# Altium PCB ATMEGA16_S52.PcbDoc
Units mm, origin at the board's own origin, x right, y up, seen from the top; angles counter-clockwise.
Board outline 152.4 x 101.6 mm, 2 copper layers (Top Layer, Bottom Layer); 2 components, 39 nets, 80 pads, 15 vias.
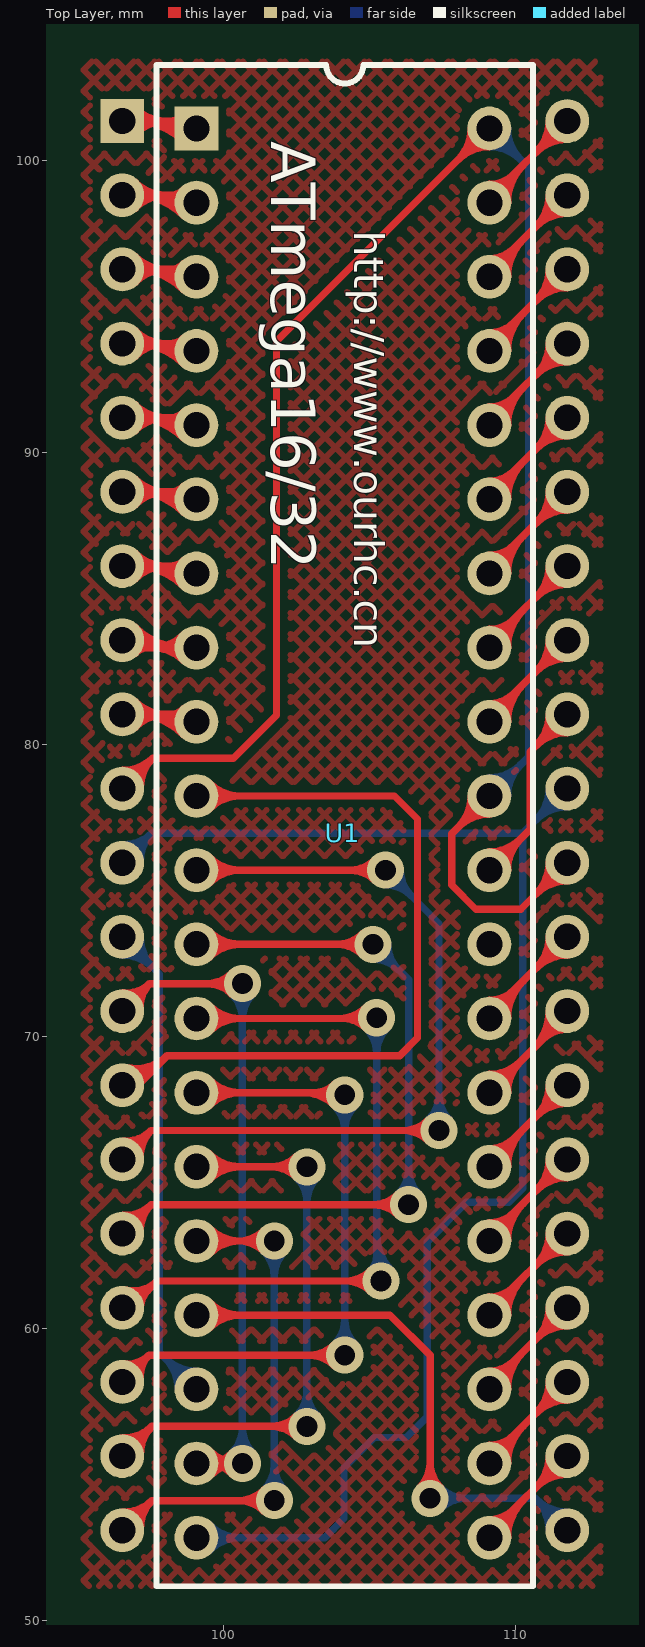
[diagram p0: Top Layer view]
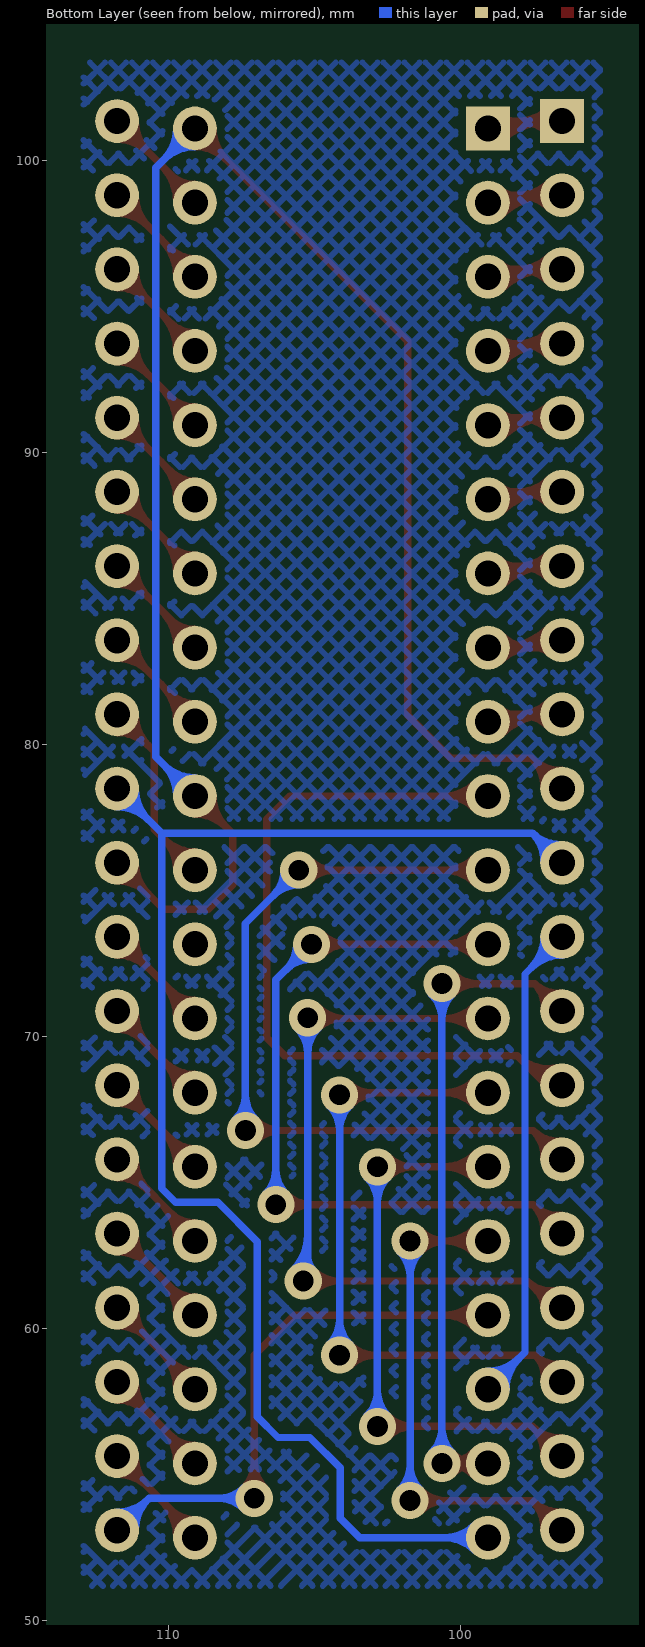
[diagram p1: Bottom Layer view, seen from below]

## Layer stack, top to bottom
Top Layer: signal copper 0.0356
Dielectric: dielectric 0.32, FR-4, Dk 4.8
Bottom Layer: signal copper 0.0356

## Board outline
25.4,25.4 177.8,25.4 177.8,127 25.4,127

## Design rules (kind name [scope] priority, off if disabled: settings)
Clearance [All] p1: gap=0.254
ComponentClearance [All] p1: gap=0.254 collisioncheckmode=3 verticalgap=0.254
PolygonConnect [All] p1: connectstyle=Relief reliefconductorwidth=0.254 reliefentries=4 polygonreliefangle="90 Angle"
RoutingVias [All] p1: holewidth=0.711 width=1.27 viastyle="Through Hole" minholewidth=0.711 minwidth=1.27 maxholewidth=0.711 maxwidth=1.27
SolderMaskExpansion [All] p1: expansion=0.102
TestPointUsage [All] p1: valid=0 allowmultiple=FALSE
Testpoint [All] p1: side=15 testpointundercomponent=TRUE minsize=1.016 maxsize=2.54 preferedsize=1.524 minholesize=0 maxholesize=1.016 preferedholesize=0.813 testpointgrid=0.025 style=1023 order=0-112345678
Width [All] p1: maxlimit=0.254 minlimit=0.254 preferedwidth=0.254
17 further rules are at their usual default settings.

## Classes and differential pairs
component class ATMEGA16_S52: ATmega16/32

## Components (designator, comment, footprint, x,y, rotation, side; value= is the part's Value field where it differs from the comment)
ATmega16/32 "ATmega16-16PI" DIP-40 104.14,77.216 r270 top (schematic designator ATmega16-16PI)
U1 "AT89S52" "DIP-40 - duplicate" 101.6,75.692 r270 top

## Footprints (in the part's own frame and the unit in brackets; to place one, negate y for a bottom-side part, rotate by r counter-clockwise, add the part's x,y. Pads: shape width x height; smd on the part's side, far side on the other; paste and mask are expansions set on the pad)
DIP-40 [mm] "DIP; 40 Leads; Row Spacing 15.24 mm; Pitch 2.54 mm"
  rect 1.5x1.5 hole 0.9: 1(-24.13,-7.62)
  round 1.5 hole 0.9: 2(-21.59,-7.62) 3(-19.05,-7.62) 4(-16.51,-7.62) 5(-13.97,-7.62) 6(-11.43,-7.62) 7(-8.89,-7.62) 8(-6.35,-7.62) 9(-3.81,-7.62) 10(-1.27,-7.62) 11(1.27,-7.62) 12(3.81,-7.62) 13(6.35,-7.62) 14(8.89,-7.62) 15(11.43,-7.62) 16(13.97,-7.62) 17(16.51,-7.62) 18(19.05,-7.62) 19(21.59,-7.62) 20(24.13,-7.62) 21(24.13,7.62) 22(21.59,7.62) 23(19.05,7.62) 24(16.51,7.62) 25(13.97,7.62) 26(11.43,7.62) 27(8.89,7.62) 28(6.35,7.62) 29(3.81,7.62) 30(1.27,7.62) 31(-1.27,7.62) 32(-3.81,7.62) 33(-6.35,7.62) 34(-8.89,7.62) 35(-11.43,7.62) 36(-13.97,7.62) 37(-16.51,7.62) 38(-19.05,7.62) 39(-21.59,7.62) 40(-24.13,7.62)
  silkscreen extent -26.05,-6.45 26.05,6.45
"DIP-40 - duplicate" [mm] "DIP; 40 Leads; Row Spacing 15.24 mm; Pitch 2.54 mm"
  rect 1.5x1.5 hole 0.9: 1(-25.4,-2.54)
  round 1.5 hole 0.9: 2(-22.86,-2.54) 3(-20.32,-2.54) 4(-17.78,-2.54) 5(-15.24,-2.54) 6(-12.7,-2.54) 7(-10.16,-2.54) 8(-7.62,-2.54) 9(-5.08,-2.54) 10(-2.54,-2.54) 11(0,-2.54) 12(2.54,-2.54) 13(5.08,-2.54) 14(7.62,-2.54) 15(10.16,-2.54) 16(12.7,-2.54) 17(15.24,-2.54) 18(17.78,-2.54) 19(20.32,-2.54) 20(22.86,-2.54) 21(22.86,7.493) 22(20.32,7.493) 23(17.78,7.493) 24(15.24,7.493) 25(12.7,7.493) 26(10.16,7.493) 27(7.62,7.493) 28(5.08,7.493) 29(2.54,7.493) 30(0,7.493) 31(-2.54,7.493) 32(-5.08,7.493) 33(-7.62,7.493) 34(-10.16,7.493) 35(-12.7,7.493) 36(-15.24,7.493) 37(-17.78,7.493) 38(-20.32,7.493) 39(-22.86,7.493) 40(-25.4,7.493)

## Part data
ATmega16/32: library part ATmega16-P, "8 位微处理器/40引脚"
U1: library part 8051

## Via types
v1: diameter 1.27, hole 0.711, Top Layer to Bottom Layer, 15 vias

## Nets (pads, with @x,y where several pads share a name; then routed paths per layer and width w, separated by ;. In a path a pad name is that pad's centre, name@x,y a point inside that pad or via, vN(x,y) a via of type N, cw(c..) or ccw(c..) an arc to the next point about the centre after c; other vN are vias at no path point)
ALE: ATmega16/32.32 U1.30 | length 14
  Top Layer w0.254: U1.30 110.49,77.089 110.49,79.756 ATmega16/32.32 ; U1.30@109.093,76.061 ccw(c109.093,76.952) 109.723,76.322 ccw(c110.353,75.692) U1.30@109.462,75.692 ; U1.30@109.093,76.315 ccw(c109.093,77.819) 110.157,76.756 ccw(c111.22,75.692) U1.30@109.716,75.692 ; ATmega16/32.32@111.137,81.026 cw(c109.633,81.026) 110.696,79.962 cw(c111.76,78.899) ATmega16/32.32@111.76,80.403 ; ATmega16/32.32@111.391,81.026 cw(c110.5,81.026) 111.13,80.396 cw(c111.76,79.766) ATmega16/32.32@111.76,80.657
GND: ATmega16/32.11 ATmega16/32.31 U1.20 | length 60.1
  Bottom Layer w0.254: ATmega16/32.11 97.536,76.962 ; ATmega16/32.11@96.532,76.315 ccw(c96.558,77.111) 97.122,76.548 ccw(c97.685,75.984) ATmega16/32.11@96.889,75.958 ; ATmega16/32.11@96.54,76.569 ccw(c96.585,77.913) 97.536,76.962 ; ATmega16/32.11@97.143,75.966 cw(c98.487,76.011) 97.536,76.962 ; U1.20 103.454,52.832 104.115,53.492 104.115,55.22 105.156,56.261 106.248,56.261 106.959,56.972 106.959,62.967 108.306,64.313 109.759,64.313 110.236,64.789 110.236,76.962 ; U1.20@99.321,52.571 cw(c99.951,51.941) 99.951,52.832 cw(c99.951,53.723) U1.20@99.321,53.093 ; U1.20@99.501,52.391 cw(c100.564,51.328) 100.564,52.832 cw(c100.564,54.336) U1.20@99.501,53.273 ; ATmega16/32.31@111.137,78.486 cw(c109.633,78.486) 110.696,77.422 cw(c111.76,76.359) ATmega16/32.31@111.76,77.863 ; ATmega16/32.31@111.391,78.486 cw(c110.5,78.486) 111.13,77.856 cw(c111.76,77.226) ATmega16/32.31@111.76,78.117 ; ATmega16/32.31 110.236,76.962 ; 97.536,76.962 110.236,76.962
P0.0: ATmega16/32.40 U1.39 | length 11
  Top Layer w0.254: U1.39 109.093,98.679 ATmega16/32.40 ; U1.39@109.093,99.175 ccw(c109.093,100.372) 109.94,99.526 ; U1.39@109.462,98.552 cw(c110.659,98.552) 109.813,99.399 ; U1.39@109.716,98.552 cw(c111.527,98.552) 110.246,99.832 ; ATmega16/32.40@111.137,101.346 cw(c109.633,101.346) 110.696,100.282 cw(c111.76,99.219) ATmega16/32.40@111.76,100.723 ; ATmega16/32.40@111.391,101.346 cw(c110.5,101.346) 111.13,100.716 cw(c111.76,100.086) ATmega16/32.40@111.76,100.977
P0.1: ATmega16/32.39 U1.38 | length 11
  Top Layer w0.254: U1.38 109.093,96.139 ATmega16/32.39 ; U1.38@109.093,96.635 ccw(c109.093,97.832) 109.94,96.986 ; U1.38@109.462,96.012 cw(c110.659,96.012) 109.813,96.859 ; U1.38@109.716,96.012 cw(c111.527,96.012) 110.246,97.292 ; ATmega16/32.39@111.137,98.806 cw(c109.633,98.806) 110.696,97.742 cw(c111.76,96.679) ATmega16/32.39@111.76,98.183 ; ATmega16/32.39@111.391,98.806 cw(c110.5,98.806) 111.13,98.176 cw(c111.76,97.546) ATmega16/32.39@111.76,98.437
P0.2: ATmega16/32.38 U1.37 | length 11
  Top Layer w0.254: U1.37 109.093,93.599 ATmega16/32.38 ; U1.37@109.093,94.095 ccw(c109.093,95.292) 109.94,94.446 ; U1.37@109.462,93.472 cw(c110.659,93.472) 109.813,94.319 ; U1.37@109.716,93.472 cw(c111.527,93.472) 110.246,94.752 ; ATmega16/32.38@111.137,96.266 cw(c109.633,96.266) 110.696,95.202 cw(c111.76,94.139) ATmega16/32.38@111.76,95.643 ; ATmega16/32.38@111.391,96.266 cw(c110.5,96.266) 111.13,95.636 cw(c111.76,95.006) ATmega16/32.38@111.76,95.897
P0.3: ATmega16/32.37 U1.36 | length 11
  Top Layer w0.254: U1.36 109.093,91.059 ATmega16/32.37 ; U1.36@109.093,91.555 ccw(c109.093,92.752) 109.94,91.906 ; U1.36@109.462,90.932 cw(c110.659,90.932) 109.813,91.779 ; U1.36@109.716,90.932 cw(c111.527,90.932) 110.246,92.212 ; ATmega16/32.37@111.137,93.726 cw(c109.633,93.726) 110.696,92.662 cw(c111.76,91.599) ATmega16/32.37@111.76,93.103 ; ATmega16/32.37@111.391,93.726 cw(c110.5,93.726) 111.13,93.096 cw(c111.76,92.466) ATmega16/32.37@111.76,93.357
P0.4: ATmega16/32.36 U1.35 | length 11
  Top Layer w0.254: U1.35 109.093,88.519 ATmega16/32.36 ; U1.35@109.093,89.015 ccw(c109.093,90.212) 109.94,89.366 ; U1.35@109.462,88.392 cw(c110.659,88.392) 109.813,89.239 ; U1.35@109.716,88.392 cw(c111.527,88.392) 110.246,89.672 ; ATmega16/32.36@111.137,91.186 cw(c109.633,91.186) 110.696,90.122 cw(c111.76,89.059) ATmega16/32.36@111.76,90.563 ; ATmega16/32.36@111.391,91.186 cw(c110.5,91.186) 111.13,90.556 cw(c111.76,89.926) ATmega16/32.36@111.76,90.817
P0.5: ATmega16/32.35 U1.34 | length 11
  Top Layer w0.254: U1.34 109.093,85.979 ATmega16/32.35 ; U1.34@109.093,86.475 ccw(c109.093,87.672) 109.94,86.826 ; U1.34@109.462,85.852 cw(c110.659,85.852) 109.813,86.699 ; U1.34@109.716,85.852 cw(c111.527,85.852) 110.246,87.132 ; ATmega16/32.35@111.137,88.646 cw(c109.633,88.646) 110.696,87.582 cw(c111.76,86.519) ATmega16/32.35@111.76,88.023 ; ATmega16/32.35@111.391,88.646 cw(c110.5,88.646) 111.13,88.016 cw(c111.76,87.386) ATmega16/32.35@111.76,88.277
P0.6: ATmega16/32.34 U1.33 | length 11
  Top Layer w0.254: U1.33 109.093,83.439 ATmega16/32.34 ; U1.33@109.093,83.935 ccw(c109.093,85.132) 109.94,84.286 ; U1.33@109.462,83.312 cw(c110.659,83.312) 109.813,84.159 ; U1.33@109.716,83.312 cw(c111.527,83.312) 110.246,84.592 ; ATmega16/32.34@111.137,86.106 cw(c109.633,86.106) 110.696,85.042 cw(c111.76,83.979) ATmega16/32.34@111.76,85.483 ; ATmega16/32.34@111.391,86.106 cw(c110.5,86.106) 111.13,85.476 cw(c111.76,84.846) ATmega16/32.34@111.76,85.737
P0.7: ATmega16/32.33 U1.32 | length 11
  Top Layer w0.254: U1.32 109.093,80.899 ATmega16/32.33 ; U1.32@109.093,81.395 ccw(c109.093,82.592) 109.94,81.746 ; U1.32@109.462,80.772 cw(c110.659,80.772) 109.813,81.619 ; U1.32@109.716,80.772 cw(c111.527,80.772) 110.246,82.052 ; ATmega16/32.33@111.137,83.566 cw(c109.633,83.566) 110.696,82.502 cw(c111.76,81.439) ATmega16/32.33@111.76,82.943 ; ATmega16/32.33@111.391,83.566 cw(c110.5,83.566) 111.13,82.936 cw(c111.76,82.306) ATmega16/32.33@111.76,83.197
P1.0: ATmega16/32.1 U1.1 | length 11
  Top Layer w0.254: ATmega16/32.1 98.806,101.346 U1.1 ; ATmega16/32.1@96.781,101.085 cw(c97.411,100.455) 97.411,101.346 cw(c97.411,102.237) ATmega16/32.1@96.781,101.607 ; ATmega16/32.1@96.943,101.346 cw(c96.943,98.975) U1.1@98.619,100.651 ; ATmega16/32.1@96.961,100.905 cw(c98.024,99.842) 98.024,101.346 cw(c98.024,102.85) ATmega16/32.1@96.961,101.787 ; 97.556,101.346 cw(c97.556,99.588) U1.1@98.799,100.831 ; U1.1@98.619,101.533 cw(c98.169,101.983) 98.169,101.346 cw(c98.169,100.201) U1.1@98.979,101.011
P1.1: ATmega16/32.2 U1.2 | length 11
  Top Layer w0.254: ATmega16/32.2 98.806,98.806 U1.2 ; ATmega16/32.2@96.781,98.545 cw(c97.411,97.915) 97.411,98.806 cw(c97.411,99.697) ATmega16/32.2@96.781,99.067 ; ATmega16/32.2@96.943,98.806 cw(c96.943,96.435) U1.2@98.619,98.111 ; ATmega16/32.2@96.961,98.365 cw(c98.024,97.302) 98.024,98.806 cw(c98.024,100.31) ATmega16/32.2@96.961,99.247 ; 97.556,98.806 cw(c97.556,97.048) U1.2@98.799,98.291 ; U1.2@98.619,98.993 cw(c98.169,99.443) 98.169,98.806 cw(c98.169,97.661) U1.2@98.979,98.471
P1.2: ATmega16/32.3 U1.3 | length 11
  Top Layer w0.254: ATmega16/32.3 98.806,96.266 U1.3 ; ATmega16/32.3@96.781,96.005 cw(c97.411,95.375) 97.411,96.266 cw(c97.411,97.157) ATmega16/32.3@96.781,96.527 ; ATmega16/32.3@96.943,96.266 cw(c96.943,93.895) U1.3@98.619,95.571 ; ATmega16/32.3@96.961,95.825 cw(c98.024,94.762) 98.024,96.266 cw(c98.024,97.77) ATmega16/32.3@96.961,96.707 ; 97.556,96.266 cw(c97.556,94.508) U1.3@98.799,95.751 ; U1.3@98.619,96.453 cw(c98.169,96.903) 98.169,96.266 cw(c98.169,95.121) U1.3@98.979,95.931
P1.3: ATmega16/32.4 U1.4 | length 11
  Top Layer w0.254: ATmega16/32.4 98.806,93.726 U1.4 ; ATmega16/32.4@96.781,93.465 cw(c97.411,92.835) 97.411,93.726 cw(c97.411,94.617) ATmega16/32.4@96.781,93.987 ; ATmega16/32.4@96.943,93.726 cw(c96.943,91.355) U1.4@98.619,93.031 ; ATmega16/32.4@96.961,93.285 cw(c98.024,92.222) 98.024,93.726 cw(c98.024,95.23) ATmega16/32.4@96.961,94.167 ; 97.556,93.726 cw(c97.556,91.968) U1.4@98.799,93.211 ; U1.4@98.619,93.913 cw(c98.169,94.363) 98.169,93.726 cw(c98.169,92.581) U1.4@98.979,93.391
P1.4: ATmega16/32.5 U1.5 | length 11
  Top Layer w0.254: ATmega16/32.5 98.806,91.186 U1.5 ; ATmega16/32.5@96.781,90.925 cw(c97.411,90.295) 97.411,91.186 cw(c97.411,92.077) ATmega16/32.5@96.781,91.447 ; ATmega16/32.5@96.943,91.186 cw(c96.943,88.815) U1.5@98.619,90.491 ; ATmega16/32.5@96.961,90.745 cw(c98.024,89.682) 98.024,91.186 cw(c98.024,92.69) ATmega16/32.5@96.961,91.627 ; 97.556,91.186 cw(c97.556,89.428) U1.5@98.799,90.671 ; U1.5@98.619,91.373 cw(c98.169,91.823) 98.169,91.186 cw(c98.169,90.041) U1.5@98.979,90.851
P1.5: ATmega16/32.6 U1.6 | length 11
  Top Layer w0.254: ATmega16/32.6 98.806,88.646 U1.6 ; ATmega16/32.6@96.781,88.385 cw(c97.411,87.755) 97.411,88.646 cw(c97.411,89.537) ATmega16/32.6@96.781,88.907 ; ATmega16/32.6@96.943,88.646 cw(c96.943,86.275) U1.6@98.619,87.951 ; ATmega16/32.6@96.961,88.205 cw(c98.024,87.142) 98.024,88.646 cw(c98.024,90.15) ATmega16/32.6@96.961,89.087 ; 97.556,88.646 cw(c97.556,86.888) U1.6@98.799,88.131 ; U1.6@98.619,88.833 cw(c98.169,89.283) 98.169,88.646 cw(c98.169,87.501) U1.6@98.979,88.311
P1.6: ATmega16/32.7 U1.7 | length 11
  Top Layer w0.254: ATmega16/32.7 98.806,86.106 U1.7 ; ATmega16/32.7@96.781,85.845 cw(c97.411,85.215) 97.411,86.106 cw(c97.411,86.997) ATmega16/32.7@96.781,86.367 ; ATmega16/32.7@96.943,86.106 cw(c96.943,83.735) U1.7@98.619,85.411 ; ATmega16/32.7@96.961,85.665 cw(c98.024,84.602) 98.024,86.106 cw(c98.024,87.61) ATmega16/32.7@96.961,86.547 ; 97.556,86.106 cw(c97.556,84.348) U1.7@98.799,85.591 ; U1.7@98.619,86.293 cw(c98.169,86.743) 98.169,86.106 cw(c98.169,84.961) U1.7@98.979,85.771
P1.7: ATmega16/32.8 U1.8 | length 11
  Top Layer w0.254: ATmega16/32.8 96.774,83.312 U1.8 ; ATmega16/32.8@96.601,83.647 ccw(c97.411,84.457) 97.411,83.312 ccw(c97.411,82.675) ATmega16/32.8@96.961,83.125 ; ATmega16/32.8@96.781,83.827 ccw(c98.024,85.07) 98.024,83.312 ; ATmega16/32.8@96.961,84.007 ccw(c98.637,85.683) U1.8@98.637,83.312 ; U1.8@98.619,82.871 ccw(c97.556,81.808) 97.556,83.312 ccw(c97.556,84.816) U1.8@98.619,83.753 ; U1.8@98.799,83.051 ccw(c98.169,82.421) 98.169,83.312 ccw(c98.169,84.203) U1.8@98.799,83.573
P2.0: ATmega16/32.22 U1.21 | length 11
  Top Layer w0.254: U1.21 109.093,52.959 ATmega16/32.22 ; U1.21@109.093,53.455 ccw(c109.093,54.652) 109.94,53.806 ; U1.21@109.462,52.832 cw(c110.659,52.832) 109.813,53.679 ; U1.21@109.716,52.832 cw(c111.527,52.832) 110.246,54.112 ; ATmega16/32.22@111.137,55.626 cw(c109.633,55.626) 110.696,54.562 cw(c111.76,53.499) ATmega16/32.22@111.76,55.003 ; ATmega16/32.22@111.391,55.626 cw(c110.5,55.626) 111.13,54.996 cw(c111.76,54.366) ATmega16/32.22@111.76,55.257
P2.1: ATmega16/32.23 U1.22 | length 11
  Top Layer w0.254: U1.22 109.093,55.499 ATmega16/32.23 ; U1.22@109.093,55.995 ccw(c109.093,57.192) 109.94,56.346 ; U1.22@109.462,55.372 cw(c110.659,55.372) 109.813,56.219 ; U1.22@109.716,55.372 cw(c111.527,55.372) 110.246,56.652 ; ATmega16/32.23@111.137,58.166 cw(c109.633,58.166) 110.696,57.102 cw(c111.76,56.039) ATmega16/32.23@111.76,57.543 ; ATmega16/32.23@111.391,58.166 cw(c110.5,58.166) 111.13,57.536 cw(c111.76,56.906) ATmega16/32.23@111.76,57.797
P2.2: ATmega16/32.24 U1.23 | length 11
  Top Layer w0.254: U1.23 109.093,58.039 ATmega16/32.24 ; U1.23@109.093,58.535 ccw(c109.093,59.732) 109.94,58.886 ; U1.23@109.462,57.912 cw(c110.659,57.912) 109.813,58.759 ; U1.23@109.716,57.912 cw(c111.527,57.912) 110.246,59.192 ; ATmega16/32.24@111.137,60.706 cw(c109.633,60.706) 110.696,59.642 cw(c111.76,58.579) ATmega16/32.24@111.76,60.083 ; ATmega16/32.24@111.391,60.706 cw(c110.5,60.706) 111.13,60.076 cw(c111.76,59.446) ATmega16/32.24@111.76,60.337
P2.3: ATmega16/32.25 U1.24 | length 11
  Top Layer w0.254: U1.24 109.093,60.579 ATmega16/32.25 ; U1.24@109.093,61.075 ccw(c109.093,62.272) 109.94,61.426 ; U1.24@109.462,60.452 cw(c110.659,60.452) 109.813,61.299 ; U1.24@109.716,60.452 cw(c111.527,60.452) 110.246,61.732 ; ATmega16/32.25@111.137,63.246 cw(c109.633,63.246) 110.696,62.182 cw(c111.76,61.119) ATmega16/32.25@111.76,62.623 ; ATmega16/32.25@111.391,63.246 cw(c110.5,63.246) 111.13,62.616 cw(c111.76,61.986) ATmega16/32.25@111.76,62.877
P2.4: ATmega16/32.26 U1.25 | length 11
  Top Layer w0.254: U1.25 109.093,63.119 ATmega16/32.26 ; U1.25@109.093,63.615 ccw(c109.093,64.812) 109.94,63.966 ; U1.25@109.462,62.992 cw(c110.659,62.992) 109.813,63.839 ; U1.25@109.716,62.992 cw(c111.527,62.992) 110.246,64.272 ; ATmega16/32.26@111.137,65.786 cw(c109.633,65.786) 110.696,64.722 cw(c111.76,63.659) ATmega16/32.26@111.76,65.163 ; ATmega16/32.26@111.391,65.786 cw(c110.5,65.786) 111.13,65.156 cw(c111.76,64.526) ATmega16/32.26@111.76,65.417
P2.5: ATmega16/32.27 U1.26 | length 11
  Top Layer w0.254: U1.26 109.093,65.659 ATmega16/32.27 ; U1.26@109.093,66.155 ccw(c109.093,67.352) 109.94,66.506 ; U1.26@109.462,65.532 cw(c110.659,65.532) 109.813,66.379 ; U1.26@109.716,65.532 cw(c111.527,65.532) 110.246,66.812 ; ATmega16/32.27@111.137,68.326 cw(c109.633,68.326) 110.696,67.262 cw(c111.76,66.199) ATmega16/32.27@111.76,67.703 ; ATmega16/32.27@111.391,68.326 cw(c110.5,68.326) 111.13,67.696 cw(c111.76,67.066) ATmega16/32.27@111.76,67.957
P2.6: ATmega16/32.28 U1.27 | length 11
  Top Layer w0.254: U1.27 111.76,70.739 ATmega16/32.28 ; U1.27@109.093,68.441 ccw(c109.093,69.332) 109.723,68.702 ccw(c110.353,68.072) U1.27@109.462,68.072 ; U1.27@109.093,68.695 ccw(c109.093,70.199) 110.157,69.136 ccw(c111.22,68.072) U1.27@109.716,68.072 ; 110.607,69.586 ccw(c109.326,70.866) ATmega16/32.28@111.137,70.866 ; 110.913,69.892 cw(c111.76,69.046) ATmega16/32.28@111.76,70.243 ; 111.04,70.019 ccw(c110.194,70.866) ATmega16/32.28@111.391,70.866
P2.7: ATmega16/32.29 U1.28 | length 11
  Top Layer w0.254: U1.28 109.093,70.739 ATmega16/32.29 ; U1.28@109.093,71.235 ccw(c109.093,72.432) 109.94,71.586 ; U1.28@109.462,70.612 cw(c110.659,70.612) 109.813,71.459 ; U1.28@109.716,70.612 cw(c111.527,70.612) 110.246,71.892 ; ATmega16/32.29@111.137,73.406 cw(c109.633,73.406) 110.696,72.342 cw(c111.76,71.279) ATmega16/32.29@111.76,72.783 ; ATmega16/32.29@111.391,73.406 cw(c110.5,73.406) 111.13,72.776 cw(c111.76,72.146) ATmega16/32.29@111.76,73.037
P3.0: ATmega16/32.14 U1.10 | length 33.6
  Top Layer w0.254: ATmega16/32.14 97.044,68.326 98.06,69.342 ; ATmega16/32.14@96.545,68.438 ccw(c96.748,69.347) 97.406,68.688 ; ATmega16/32.14@96.6,68.686 ccw(c96.867,69.881) 97.733,69.015 ; ATmega16/32.14@96.656,68.934 ccw(c96.987,70.415) 98.06,69.342 ; U1.10 105.842,78.232 106.629,77.445 106.629,69.952 106.02,69.342 98.06,69.342 ; U1.10@99.321,77.971 cw(c99.951,77.341) 99.951,78.232 cw(c99.951,79.123) U1.10@99.321,78.493 ; U1.10@99.501,77.791 cw(c100.564,76.728) 100.564,78.232 cw(c100.564,79.736) U1.10@99.501,78.673
P3.1: ATmega16/32.15 U1.11 | length 42.2
  Top Layer w0.254: ATmega16/32.15 97.511,66.777 ; ATmega16/32.15@96.539,66.155 ccw(c96.578,66.902) 97.107,66.373 ccw(c97.636,65.844) ATmega16/32.15@96.889,65.805 ; ATmega16/32.15@96.552,66.408 ccw(c96.617,67.67) 97.511,66.777 ; ATmega16/32.15@97.142,65.818 cw(c98.404,65.883) 97.511,66.777 ; U1.11 v1(105.537,75.692) ; U1.11@99.321,75.431 cw(c99.951,74.801) 99.951,75.692 cw(c99.951,76.583) U1.11@99.321,75.953 ; U1.11@99.501,75.251 cw(c100.564,74.188) 100.564,75.692 cw(c100.564,77.196) U1.11@99.501,76.133 ; v1@105.178,75.333 ccw(c104.311,74.466) 104.311,75.692 ccw(c104.311,76.918) v1@105.178,76.051 ; v1@107.007,66.417 ccw(c106.139,65.55) 106.139,66.777 ccw(c106.139,68.003) v1@107.007,67.136 ; v1(107.366,66.777) 97.511,66.777
  Bottom Layer w0.254: v1@105.537,75.184 cw(c105.537,73.958) 106.404,74.825 cw(c107.271,75.692) v1@106.045,75.692 ; v1(105.537,75.692) 107.366,73.863 v1(107.366,66.777) ; v1@107.007,67.136 ccw(c106.139,68.003) 107.366,68.003 ccw(c108.592,68.003) v1@107.725,67.136
P3.2: ATmega16/32.16 U1.12 | length 40.5
  Top Layer w0.254: ATmega16/32.16 97.511,64.237 ; ATmega16/32.16@96.539,63.615 ccw(c96.578,64.362) 97.107,63.833 ccw(c97.636,63.304) ATmega16/32.16@96.889,63.265 ; ATmega16/32.16@96.552,63.868 ccw(c96.617,65.13) 97.511,64.237 ; ATmega16/32.16@97.142,63.278 cw(c98.404,63.343) 97.511,64.237 ; U1.12 v1(105.105,73.152) ; U1.12@99.321,72.891 cw(c99.951,72.261) 99.951,73.152 cw(c99.951,74.043) U1.12@99.321,73.413 ; U1.12@99.501,72.711 cw(c100.564,71.648) 100.564,73.152 cw(c100.564,74.656) U1.12@99.501,73.593 ; v1@104.746,72.793 ccw(c103.879,71.926) 103.879,73.152 ccw(c103.879,74.378) v1@104.746,73.511 ; v1@105.965,63.877 ccw(c105.098,63.01) 105.098,64.237 ccw(c105.098,65.463) v1@105.965,64.596 ; v1(106.324,64.237) 97.511,64.237
  Bottom Layer w0.254: v1@105.105,72.644 cw(c105.105,71.418) 105.972,72.285 cw(c106.84,73.152) v1@105.613,73.152 ; v1(105.105,73.152) 106.324,71.933 v1(106.324,64.237) ; v1@105.965,64.596 ccw(c105.098,65.463) 106.324,65.463 ccw(c107.551,65.463) v1@106.684,64.596
P3.3: ATmega16/32.17 U1.13 | length 41.5
  Top Layer w0.254: ATmega16/32.17 96.799,60.706 97.714,61.62 ; ATmega16/32.17@96.601,61.066 ccw(c96.787,61.895) 97.387,61.294 ; ATmega16/32.17@96.657,61.314 ccw(c96.907,62.427) 97.714,61.62 ; ATmega16/32.17@97.143,60.706 cw(c97.973,60.706) 97.386,61.293 ; U1.13 105.054,70.612 v1(105.232,70.637) ; U1.13@99.321,70.351 cw(c99.951,69.721) 99.951,70.612 cw(c99.951,71.503) U1.13@99.321,70.873 ; U1.13@99.501,70.171 cw(c100.564,69.108) 100.564,70.612 cw(c100.564,72.116) U1.13@99.501,71.053 ; 103.944,70.612 ccw(c103.944,71.925) v1@104.873,70.997 ; 104.067,70.612 cw(c104.067,69.472) v1@104.873,70.278 ; 104.558,70.612 ccw(c104.558,71.312) v1@105.053,70.817 ; v1@105.025,61.261 ccw(c104.158,60.394) 104.158,61.62 ccw(c104.158,62.847) v1@105.025,61.98 ; v1(105.385,61.62) 97.714,61.62
  Bottom Layer w0.254: v1@104.873,70.278 cw(c104.006,69.411) 105.232,69.411 cw(c106.459,69.411) v1@105.591,70.278 ; v1@105.025,61.98 ccw(c104.526,62.479) 105.232,62.479 ; v1@105.069,62.018 ccw(c104.8,62.357) 105.232,62.357 ; v1@105.103,62.043 ccw(c104.936,62.296) 105.232,62.357 ; 105.232,62.602 ccw(c106.366,62.602) v1@105.564,61.8 ; 105.232,63.215 ccw(c106.979,63.215) v1@105.744,61.98 ; v1(105.232,70.637) 105.232,62.357 ; v1(105.385,61.62) 105.232,62.357 ; v1@105.44,62.125 cw(c105.465,62.357) 105.232,62.357 ; v1@105.475,62.12 cw(c105.529,62.418) 105.232,62.357
P3.4: ATmega16/32.18 U1.14 | length 37.1
  Top Layer w0.254: ATmega16/32.18 97.434,59.08 ; ATmega16/32.18@96.561,58.533 ccw(c96.63,59.139) 97.062,58.708 ccw(c97.493,58.276) ATmega16/32.18@96.887,58.207 ; ATmega16/32.18@96.59,58.785 ccw(c96.706,59.809) 97.434,59.08 ; ATmega16/32.18@97.139,58.236 cw(c98.163,58.352) 97.434,59.08 ; U1.14 104.064,68.072 v1(104.14,67.996) ; U1.14@99.321,67.811 cw(c99.951,67.181) 99.951,68.072 cw(c99.951,68.963) U1.14@99.321,68.333 ; U1.14@99.501,67.631 cw(c100.564,66.568) 100.564,68.072 cw(c100.564,69.576) U1.14@99.501,68.513 ; 102.73,68.072 cw(c102.73,66.585) v1@103.781,67.637 ; 103.098,68.072 ccw(c103.098,69.038) v1@103.781,68.355 ; 103.343,68.072 cw(c103.343,67.199) v1@103.96,67.816 ; v1@103.781,58.721 ccw(c102.914,57.854) 102.914,59.08 ccw(c102.914,60.307) v1@103.781,59.44 ; v1(104.14,59.08) 97.434,59.08
  Bottom Layer w0.254: v1@103.781,59.44 ccw(c102.914,60.307) 104.14,60.307 ccw(c105.366,60.307) v1@104.499,59.44 ; v1@103.781,67.637 cw(c102.914,66.769) 104.14,66.769 cw(c105.366,66.769) v1@104.499,67.637 ; v1(104.14,59.08) v1(104.14,67.996)
P3.5: ATmega16/32.19 U1.15 | length 34.4
  Top Layer w0.254: ATmega16/32.19 97.536,56.642 ; ATmega16/32.19@96.532,55.995 ccw(c96.558,56.791) 97.122,56.228 ccw(c97.685,55.664) ATmega16/32.19@96.889,55.638 ; ATmega16/32.19@96.54,56.249 ccw(c96.585,57.593) 97.536,56.642 ; ATmega16/32.19@97.143,55.646 cw(c98.487,55.691) 97.536,56.642 ; U1.15 v1(102.845,65.532) ; U1.15@99.321,65.271 cw(c99.951,64.641) 99.951,65.532 cw(c99.951,66.423) U1.15@99.321,65.793 ; U1.15@99.501,65.091 cw(c100.564,64.028) 100.564,65.532 cw(c100.564,67.036) U1.15@99.501,65.973 ; v1@102.485,56.283 ccw(c101.618,55.416) 101.618,56.642 ccw(c101.618,57.868) v1@102.485,57.001 ; v1@102.485,65.173 ccw(c101.618,64.306) 101.618,65.532 ccw(c101.618,66.758) v1@102.485,65.891 ; v1(102.845,56.642) 97.536,56.642
  Bottom Layer w0.254: v1@102.485,57.001 ccw(c101.618,57.868) 102.845,57.868 ccw(c104.071,57.868) v1@103.204,57.001 ; v1@102.485,65.173 cw(c101.618,64.306) 102.845,64.306 cw(c104.071,64.306) v1@103.204,65.173 ; v1(102.845,56.642) v1(102.845,65.532)
P3.6: ATmega16/32.20 U1.16 | length 32.2
  Top Layer w0.254: ATmega16/32.20 97.536,54.102 ; ATmega16/32.20@96.532,53.455 ccw(c96.558,54.251) 97.122,53.688 ccw(c97.685,53.124) ATmega16/32.20@96.889,53.098 ; ATmega16/32.20@96.54,53.709 ccw(c96.585,55.053) 97.536,54.102 ; ATmega16/32.20@97.143,53.106 cw(c98.487,53.151) 97.536,54.102 ; U1.16 v1(101.727,62.992) ; U1.16@99.321,62.731 cw(c99.951,62.101) 99.951,62.992 cw(c99.951,63.883) U1.16@99.321,63.253 ; U1.16@99.501,62.551 cw(c100.564,61.488) 100.564,62.992 cw(c100.564,64.496) U1.16@99.501,63.433 ; v1@101.368,53.743 ccw(c100.501,52.876) 100.501,54.102 ccw(c100.501,55.328) v1@101.368,54.461 ; v1@101.368,62.633 ccw(c100.501,61.766) 100.501,62.992 ccw(c100.501,64.218) v1@101.368,63.351 ; v1(101.727,54.102) 97.536,54.102
  Bottom Layer w0.254: v1@101.368,54.461 ccw(c100.501,55.328) 101.727,55.328 ccw(c102.953,55.328) v1@102.086,54.461 ; v1@101.368,62.633 cw(c100.501,61.766) 101.727,61.766 cw(c102.953,61.766) v1@102.086,62.633 ; v1(101.727,54.102) v1(101.727,62.992)
P3.7: ATmega16/32.21 U1.17 | length 30
  Top Layer w0.254: U1.17 105.689,60.452 107.061,59.08 v1(107.061,54.178) ; U1.17@99.321,60.191 cw(c99.951,59.561) 99.951,60.452 cw(c99.951,61.343) U1.17@99.321,60.713 ; U1.17@99.501,60.011 cw(c100.564,58.948) 100.564,60.452 cw(c100.564,61.956) U1.17@99.501,60.893 ; v1@106.702,54.537 ccw(c105.835,55.405) 107.061,55.405 ccw(c108.287,55.405) v1@107.42,54.537
  Bottom Layer w0.254: v1(107.061,54.178) 110.668,54.178 ATmega16/32.21 ; v1@107.42,53.819 cw(c108.287,52.952) 108.287,54.178 cw(c108.287,55.405) v1@107.42,54.537 ; ATmega16/32.21@111.137,53.086 ccw(c109.633,53.086) 110.696,54.15 ccw(c111.76,55.213) ATmega16/32.21@111.76,53.709 ; ATmega16/32.21@111.391,53.086 ccw(c110.5,53.086) 111.13,53.716 ccw(c111.76,54.346) ATmega16/32.21@111.76,53.455
PSEN: U1.29
RES: ATmega16/32.9 U1.9 | length 11
  Top Layer w0.254: ATmega16/32.9 98.806,81.026 U1.9 ; ATmega16/32.9@96.781,80.765 cw(c97.411,80.135) 97.411,81.026 cw(c97.411,81.917) ATmega16/32.9@96.781,81.287 ; ATmega16/32.9@96.943,81.026 cw(c96.943,78.655) U1.9@98.619,80.331 ; ATmega16/32.9@96.961,80.585 cw(c98.024,79.522) 98.024,81.026 cw(c98.024,82.53) ATmega16/32.9@96.961,81.467 ; 97.556,81.026 cw(c97.556,79.268) U1.9@98.799,80.511 ; U1.9@98.619,81.213 cw(c98.169,81.663) 98.169,81.026 cw(c98.169,79.881) U1.9@98.979,80.691
VCC: ATmega16/32.10 ATmega16/32.30 U1.31 U1.40 | length 84.4
  Top Layer w0.254: ATmega16/32.10 97.561,79.527 ; ATmega16/32.10@96.526,78.855 ccw(c96.538,79.701) 97.137,79.103 ccw(c97.735,78.504) ATmega16/32.10@96.889,78.492 ; ATmega16/32.10@96.529,79.109 ccw(c96.551,80.538) 97.561,79.527 ; ATmega16/32.10@97.143,78.495 cw(c98.572,78.517) 97.561,79.527 ; U1.31@108.47,78.232 cw(c106.966,78.232) 108.029,77.168 cw(c109.093,76.105) U1.31@109.093,77.609 ; U1.40@108.47,101.092 cw(c106.966,101.092) 108.029,100.028 cw(c109.093,98.965) U1.40@109.093,100.469 ; U1.31@108.724,78.232 cw(c107.833,78.232) 108.463,77.602 cw(c109.093,76.972) U1.31@109.093,77.863 ; U1.40@108.724,101.092 cw(c107.833,101.092) 108.463,100.462 cw(c109.093,99.832) U1.40@109.093,100.723 ; U1.31 107.798,76.937 107.798,75.184 108.636,74.346 110.16,74.346 ATmega16/32.30 ; U1.40 101.803,93.802 101.803,81.001 100.33,79.527 97.561,79.527 ; ATmega16/32.30@111.137,75.946 cw(c109.633,75.946) 110.696,74.882 cw(c111.76,73.819) ATmega16/32.30@111.76,75.323 ; ATmega16/32.30@111.391,75.946 cw(c110.5,75.946) 111.13,75.316 cw(c111.76,74.686) ATmega16/32.30@111.76,75.577
  Bottom Layer w0.254: U1.31 110.439,79.578 110.439,99.746 U1.40 ; U1.31@109.093,78.601 ccw(c109.093,79.492) 109.723,78.862 ccw(c110.353,78.232) U1.31@109.462,78.232 ; U1.31@109.093,78.855 ccw(c109.093,80.359) 110.157,79.296 ccw(c111.22,78.232) U1.31@109.716,78.232 ; U1.40@109.093,100.469 cw(c109.093,98.965) 110.157,100.028 cw(c111.22,101.092) U1.40@109.716,101.092 ; U1.40@109.093,100.723 cw(c109.093,99.832) 109.723,100.462 cw(c110.353,101.092) U1.40@109.462,101.092
X1: ATmega16/32.13 U1.19 | length 37.1
  Top Layer w0.254: ATmega16/32.13 97.46,71.806 ; ATmega16/32.13@96.554,71.233 ccw(c96.613,71.886) 97.077,71.423 ccw(c97.54,70.959) ATmega16/32.13@96.887,70.9 ; ATmega16/32.13@96.577,71.486 ccw(c96.678,72.588) 97.46,71.806 ; ATmega16/32.13@97.14,70.923 cw(c98.242,71.024) 97.46,71.806 ; U1.19 v1(100.635,55.372) ; U1.19@99.321,55.111 cw(c99.951,54.481) 99.951,55.372 cw(c99.951,56.263) U1.19@99.321,55.633 ; U1.19@99.501,54.931 cw(c100.564,53.868) 100.564,55.372 cw(c100.564,56.876) U1.19@99.501,55.813 ; v1@100.276,55.013 ccw(c99.408,54.146) 99.408,55.372 ccw(c99.408,56.598) v1@100.276,55.731 ; v1@100.276,71.447 ccw(c99.408,70.579) 99.408,71.806 ccw(c99.408,73.032) v1@100.276,72.165 ; v1(100.635,71.806) 97.46,71.806
  Bottom Layer w0.254: v1@100.276,55.731 ccw(c99.408,56.598) 100.635,56.598 ccw(c101.861,56.598) v1@100.994,55.731 ; v1@100.276,71.447 cw(c99.408,70.579) 100.635,70.579 cw(c101.861,70.579) v1@100.994,71.447 ; v1(100.635,55.372) v1(100.635,71.806)
X2: ATmega16/32.12 U1.18 | length 24.1
  Bottom Layer w0.254: ATmega16/32.12@96.52,72.783 cw(c96.52,71.279) 97.584,72.342 cw(c98.647,73.406) ATmega16/32.12@97.143,73.406 ; ATmega16/32.12@96.52,73.037 cw(c96.52,72.146) 97.15,72.776 cw(c97.78,73.406) ATmega16/32.12@96.889,73.406 ; ATmega16/32.12 97.79,72.136 97.79,59.182 U1.18 ; U1.18@98.437,57.912 ccw(c96.933,57.912) 97.996,58.976 ccw(c99.06,60.039) U1.18@99.06,58.535 ; U1.18@98.691,57.912 ccw(c97.8,57.912) 98.43,58.542 ccw(c99.06,59.172) U1.18@99.06,58.281

## Polygon pours and split planes (outlines as drawn)
no net on Top Layer (hatched 45Degree grid 0.508 track 0.203): 95.225,103.378 112.903,103.378 112.903,51.181 95.199,51.181 95.199,103.378
no net on Bottom Layer (hatched 45Degree grid 0.508 track 0.203): 95.225,103.353 112.903,103.353 112.903,51.181 95.225,51.181

## Silkscreen, mask and mechanical layers (free items; w line width, h text height)
Top Overlay:
  text "http://www.ourhc.cn" at 104.47,97.587 h1.02 r270
Mechanical 1:
  lines w0.254: 94.894,50.876 94.92,103.632 ; 94.92,50.851 113.233,50.851 ; 94.971,103.683 113.157,103.683 ; 113.208,50.952 113.208,103.657